# Altium PCB SSL-2020-MainBoard1.PcbDoc
Units mm, origin at the board's own origin, x right, y up, seen from the top; angles counter-clockwise.
Board outline 117.47 x 81.66 mm, 2 copper layers (Top Layer, Bottom Layer); 55 components, 38 nets, 329 pads, 4 vias.
Unrouted connection lines stored in the file: 105.
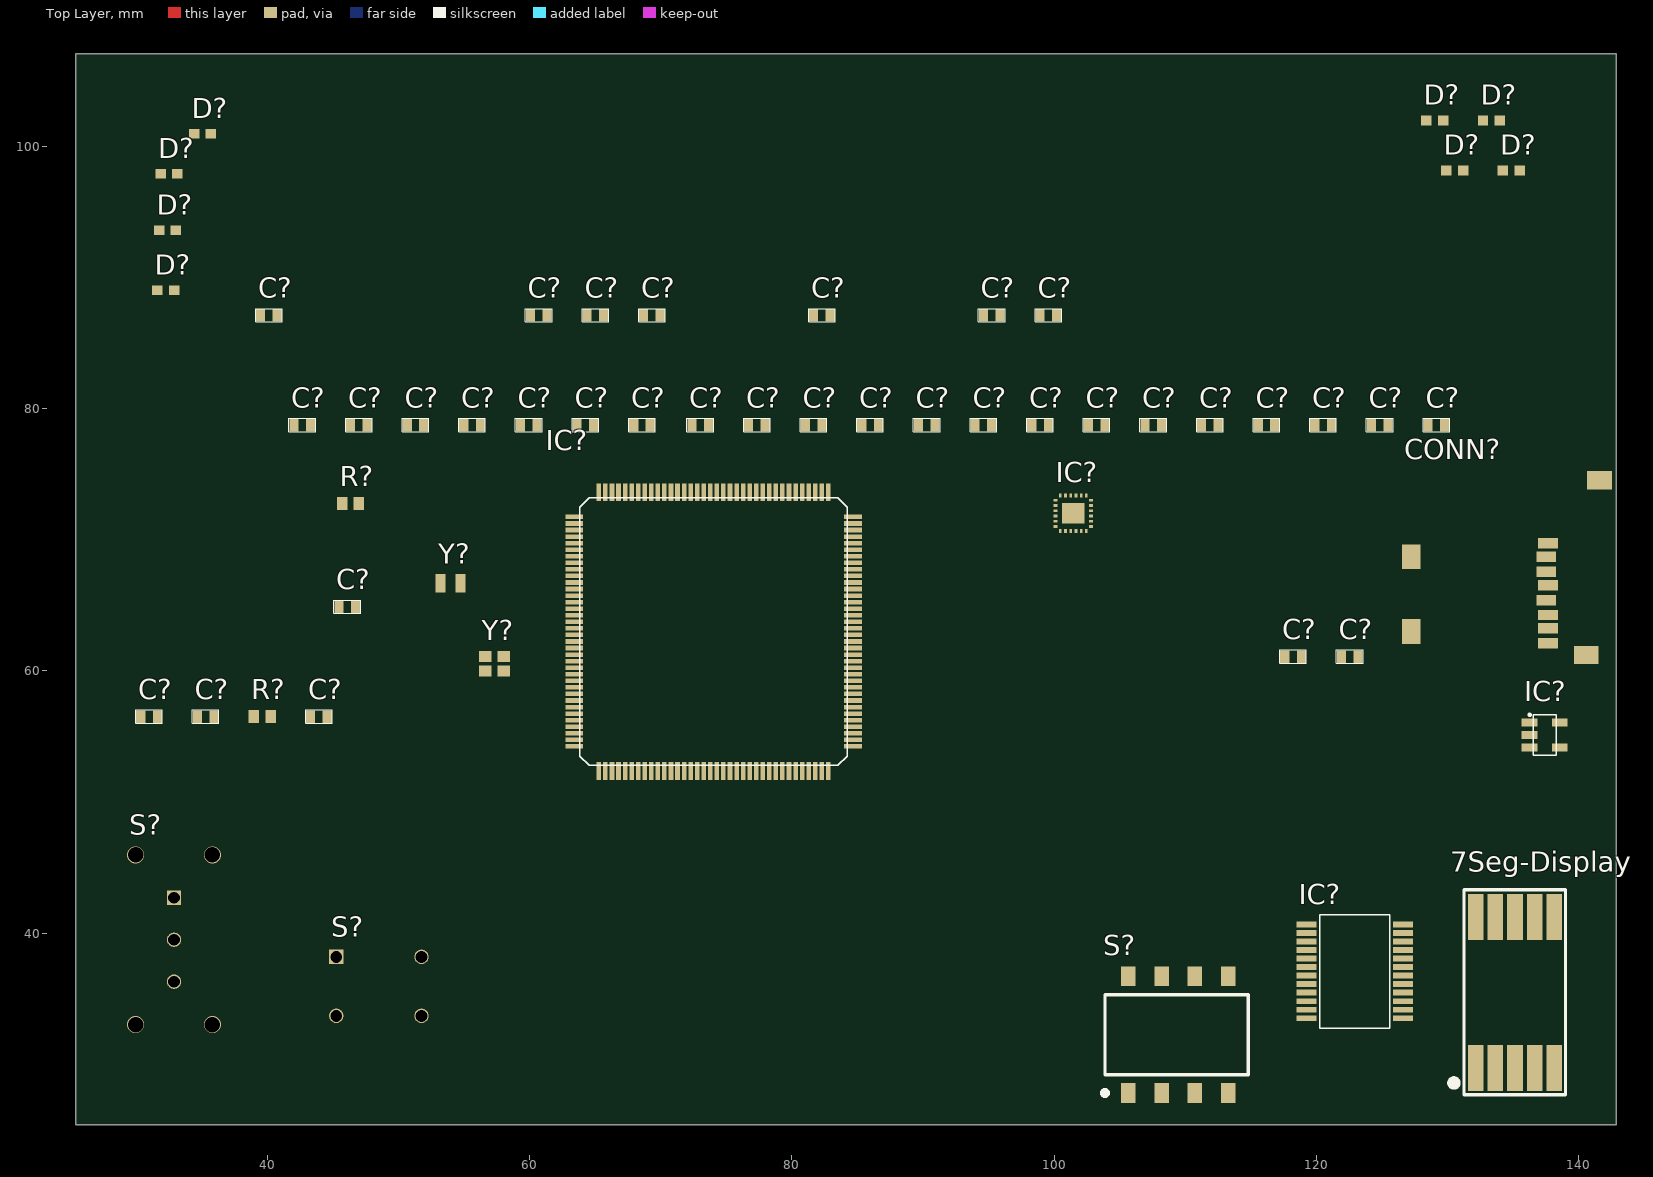
[diagram p0: Top Layer view]
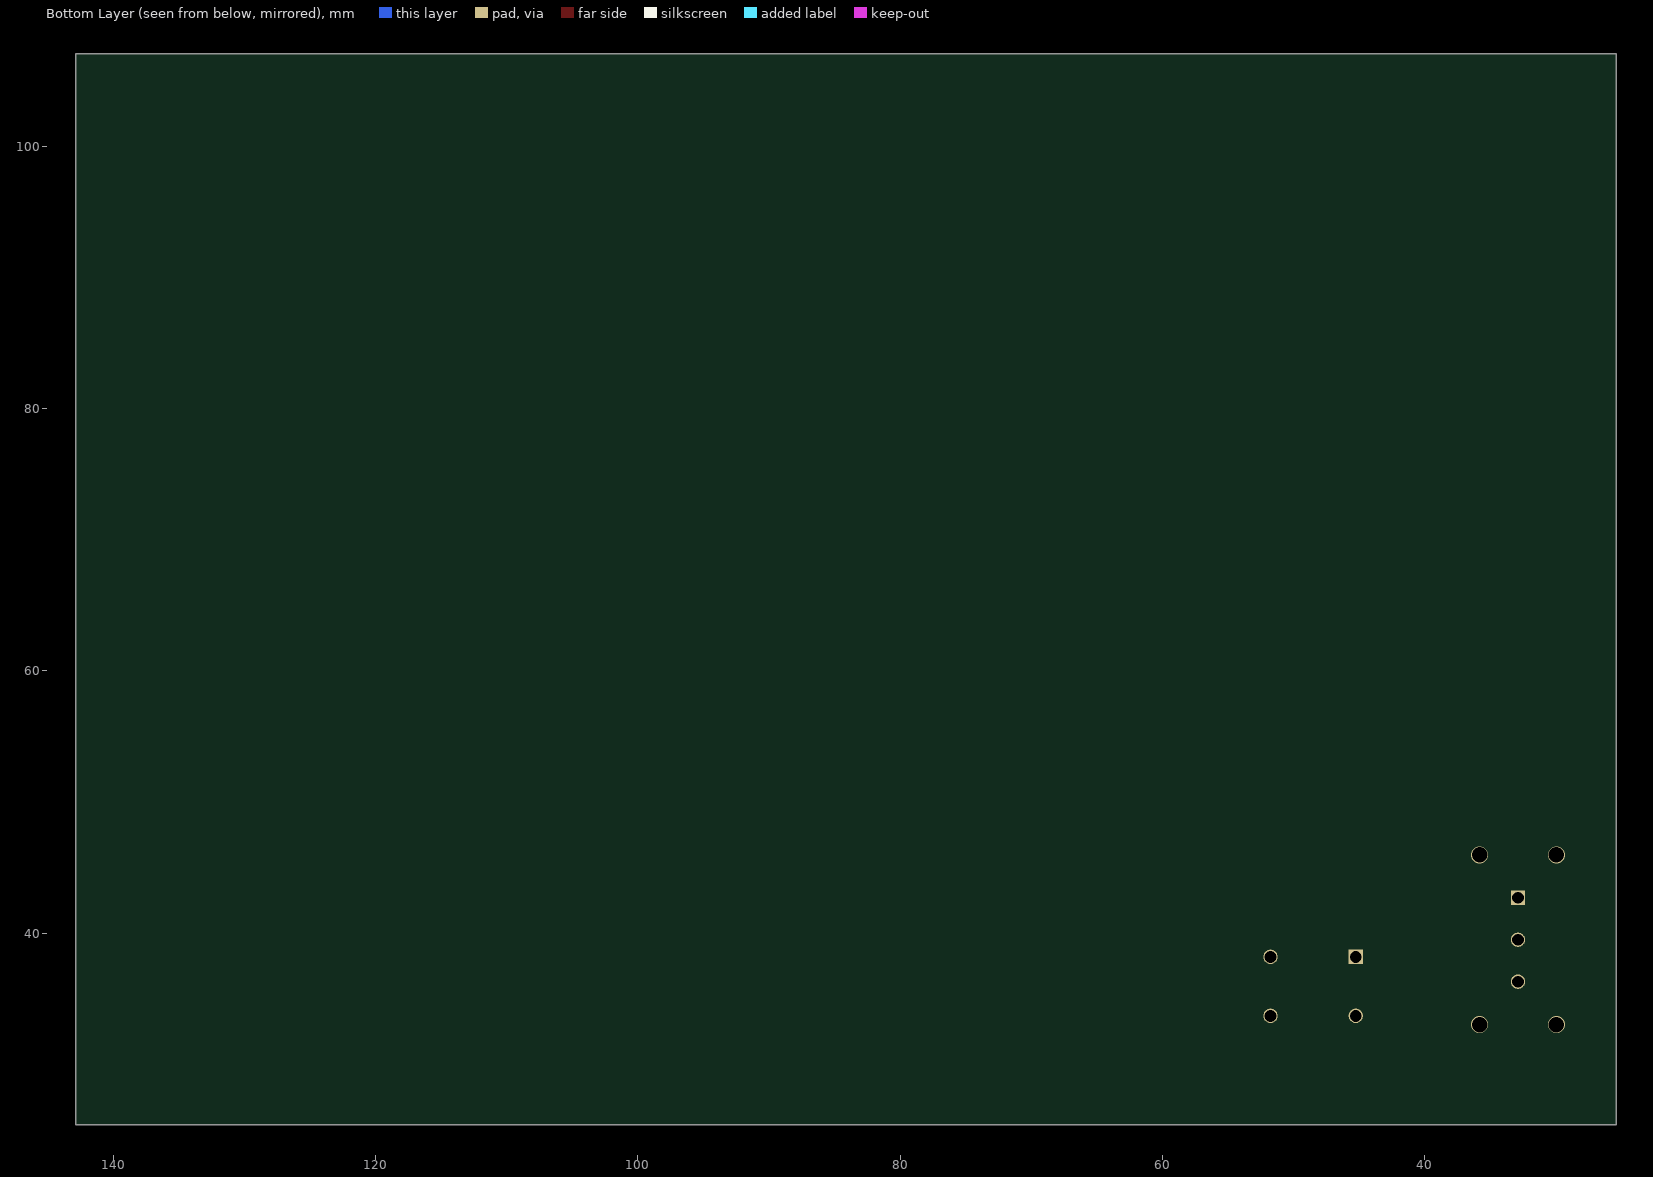
[diagram p1: Bottom Layer view, seen from below]

## Layer stack, top to bottom
Top Solder: solder mask 0.0102, Solder Resist, Dk 3.5
Top Layer: signal copper 0.0356
Dielectric 1: dielectric 0.32, FR-4, Dk 4.8
Bottom Layer: signal copper 0.0356
Bottom Solder: solder mask 0.0102, Solder Resist, Dk 3.5

## Board outline
25.4,25.4 142.875,25.4 142.875,107.061 25.4,107.061

## Design rules (kind name [scope] priority, off if disabled: settings)
Clearance [All] p1: gap=0.254 ignorepadtopadclearanceinfootprint=FALSE except(0: Arc-Hole Track-Hole SMDPad-Hole THPad-Hole Via-Hole Fill-Hole Poly-Hole Region-Hole Text-Hole)
PolygonConnect [All] p1: connectstyle=Relief reliefconductorwidth=0.254 reliefentries=4 polygonreliefangle="90 Angle" airgapwidth=0.254
RoutingVias [All] p1: holewidth=0.711 width=1.27 viastyle="Through Hole" minholewidth=0.711 minwidth=1.27 maxholewidth=0.711 maxwidth=1.27
SolderMaskExpansion [All] p1: expansion=0.102 istentingtop=FALSE
Width [All] p1: maxlimit=0.254 minlimit=0.254 preferedwidth=0.254
30 further rules are at their usual default settings.

## Classes and differential pairs
component class "Logic ICs": 7Seg-Display C? CONN? D? S?
component class Designator: C? R? S? Y?

## Components (designator, comment, footprint, x,y, rotation, side; value= is the part's Value field where it differs from the comment)
7Seg-Display "LDS-SMHTA304RISITR" LDS-SMHTA304RISITR 132.152,29.718 r0 top
C? "100nF" "CAP CER 0603" 60.706,87.122 r0 top
C? "100nF" "CAP CER 0603" 46.101,64.897 r0 top
C? "100nF" "CAP CER 0603" 99.568,87.122 r0 top
C? "100nF" "CAP CER 0603" 40.132,87.122 r0 top
C? "100nF" "CAP CER 0603" 95.25,87.122 r0 top
C? "100nF" "CAP CER 0603" 65.024,87.122 r0 top
C? "100nF" "CAP CER 0603" 69.342,87.122 r0 top
C? "100nF" "CAP CER 0603" 82.296,87.122 r0 top
C? "100nF" "CAP CER 0603" 122.555,61.087 r0 top
C? "100nF" "CAP CER 0603" 90.297,78.74 r0 top
C? "100nF" "CAP CER 0603" 103.251,78.74 r0 top
C? "12pF" "CAP CER 0603" 35.306,56.515 r0 top
C? "100nF" "CAP CER 0603" 77.343,78.74 r0 top
C? "100nF" "CAP CER 0603" 124.841,78.74 r0 top
C? "12pF" "CAP CER 0603" 55.626,78.74 r0 top
C? "10uF" "CAP CER 0603" 98.933,78.74 r0 top
C? "100nF" "CAP CER 0603" 94.615,78.74 r0 top
C? "100nF" "CAP CER 0603" 43.942,56.515 r0 top
C? "100nF" "CAP CER 0603" 51.308,78.74 r0 top
C? "100nF" "CAP CER 0603" 120.523,78.74 r0 top
C? "100nF" "CAP CER 0603" 116.205,78.74 r0 top
C? "100nF" "CAP CER 0603" 59.944,78.74 r0 top
C? "12pF" "CAP CER 0603" 118.237,61.087 r0 top
C? "100nF" "CAP CER 0603" 64.262,78.74 r0 top
C? "100nF" "CAP CER 0603" 68.58,78.74 r0 top
C? "100nF" "CAP CER 0603" 81.661,78.74 r0 top
C? "12pF" "CAP CER 0603" 129.159,78.74 r0 top
C? "1uF" "CAP CER 0603" 73.025,78.74 r0 top
C? "100nF" "CAP CER 0603" 107.569,78.74 r0 top
C? "100nF" "CAP CER 0603" 46.99,78.74 r0 top
C? "100nF" "CAP CER 0603" 42.672,78.74 r0 top
C? "100nF" "CAP CER 0603" 30.988,56.515 r0 top
C? "100nF" "CAP CER 0603" 111.887,78.74 r0 top
C? "1uF" "CAP CER 0603" 85.979,78.74 r0 top
CONN? "CONN uSD CARD" 2908-05WB-MG 135.763,67.437 r270 top
D? "150060SS55040" "LED 0603 RED" 35.052,100.965 r0 top
D? "150060BS55040" "LED 0603 BLUE" 129.032,101.981 r0 top
D? "150060YS55040" "LED 0603 YELLOW" 134.874,98.171 r0 top
D? "150060VS55040" "LED 0603 GREEN" 133.35,101.981 r0 top
D? "150060BS55040" "LED 0603 BLUE" 32.385,93.599 r0 top
D? "150060YS55040" "LED 0603 YELLOW" 32.512,97.917 r0 top
D? "150060SS55040" "LED 0603 RED" 130.556,98.171 r0 top
D? "150060VS55040" "LED 0603 GREEN" 32.258,89.027 r0 top
IC? "TCA9555DBR" SSOP-24 122.936,37.084 r0 top
IC? "24CW160T-I/OT" SOT-23-5 137.414,55.118 r0 top
IC? "ICM-20948" ICM-20948 101.473,72.009 r0 top
IC? "STM32H743ZIT6" LQFP-144 74.041,62.992 r0 top
R? "10K" "RES SMD 0603" 39.624,56.515 r0 top
R? "10K" "RES SMD 0603" 46.355,72.771 r0 top
S? "DS04-254-1-04BK-SMT" DS04-254-1-04BK-SMT 109.474,32.258 r0 top
S? "SKHHAMA010" TACT-SWITCH-6X6X5 48.514,35.941 r0 top
S? "SK12F17G7" SPDT-SWITCH 32.893,39.497 r270 top
Y? "XTAL" XTAL-200X160 57.342,60.537 r0 top
Y? "XTAL" XTAL-200X120 53.975,66.675 r0 top

## Footprints (in the part's own frame and the unit in brackets; to place one, negate y for a bottom-side part, rotate by r counter-clockwise, add the part's x,y. Pads: shape width x height; smd on the part's side, far side on the other; paste and mask are expansions set on the pad)
2908-05WB-MG [mm]
  rect 0.8x1.5 smd: 1(4.191,1.905) 2(5.334,1.905) 3(-2.286,1.905) 4(-1.27,1.778) 5(-0.127,1.778) 6(2.032,1.778) 7(0.889,1.905) 8(3.175,1.905)
  rect 1.4x1.9 smd: ""(-7.112,5.842) ""(6.223,4.826)
  rect 1.9x1.4 smd: ""(-1.27,-8.509) ""(4.445,-8.509)
  body extent -7.38,-8.74 6.62,6.46, height 1.85
"CAP CER 0603" [mm]
  rect 0.7x0.95 smd: 1(-0.635,0) 2(0.635,0)
  silkscreen extent -1.02,-0.51 1.02,0.51, body extent -0.8,-0.4 0.8,0.4, height 0.9
DS04-254-1-04BK-SMT [mm]
  rect 1.1x1.5 smd: 1(-3.81,-4.45) 2(-1.27,-4.45) 3(1.27,-4.45) 4(3.81,-4.45) 5(-3.81,4.45) 6(-1.27,4.45) 7(1.27,4.45) 8(3.81,4.45)
  silkscreen extent -5.71,-4.58 5.33,3.05, body extent -5.71,-4.95 5.45,4.95, height 4.55
ICM-20948 [mm]
  rect 0.3x0.2 smd: 1(-1.35,1) 2(-1.35,0.6) 3(-1.35,0.2) 4(-1.35,-0.2) 5(-1.35,-0.6) 6(-1.35,-1) 13(1.35,-1) 14(1.35,-0.6) 15(1.35,-0.2) 16(1.35,0.2) 17(1.35,0.6) 18(1.35,1)
  rect 0.2x0.3 smd: 7(-1,-1.35) 8(-0.6,-1.35) 9(-0.2,-1.35) 10(0.2,-1.35) 11(0.6,-1.35) 12(1,-1.35) 19(1,1.35) 20(0.6,1.35) 21(0.2,1.35) 22(-0.2,1.35) 23(-0.6,1.35) 24(-1,1.35)
  rect 1.7x1.54 smd: 25(0,0.019)
  body extent -1.51,-1.5 1.51,1.51, height 1
LDS-SMHTA304RISITR [mm]
  rect 1.2x3.5 smd: 1(0,0) 2(1.5,0) 3(3,0) 4(4.5,0) 5(6,0) 6(6,11.5) 7(4.5,11.5) 8(3,11.5) 9(1.5,11.5) 10(0,11.5)
  silkscreen extent -1.9,-2.03 6.86,13.59
"LED 0603 BLUE" [mm]
  rect 0.8x0.75 smd mask+0.05: 1(-0.635,0) 2(0.635,0)
  body extent -0.8,-0.4 0.8,0.4, height 0.6
"LED 0603 GREEN" [mm]
  rect 0.8x0.75 smd mask+0.05: 1(-0.635,0) 2(0.635,0)
  body extent -0.8,-0.4 0.8,0.4, height 0.6
"LED 0603 RED" [mm]
  rect 0.8x0.75 smd mask+0.05: 1(-0.635,0) 2(0.635,0)
  body extent -0.8,-0.4 0.8,0.4, height 0.6
"LED 0603 YELLOW" [mm]
  rect 0.8x0.75 smd mask+0.05: 1(-0.635,0) 2(0.635,0)
  body extent -0.8,-0.4 0.8,0.4, height 0.6
LQFP-144 [mm]
  rect 1.35x0.35 smd: 1(-10.625,8.75) 2(-10.625,8.25) 3(-10.625,7.75) 4(-10.625,7.25) 5(-10.625,6.75) 6(-10.625,6.25) 7(-10.625,5.75) 8(-10.625,5.25) 9(-10.625,4.75) 10(-10.625,4.25) 11(-10.625,3.75) 12(-10.625,3.25) 13(-10.625,2.75) 14(-10.625,2.25) 15(-10.625,1.75) 16(-10.625,1.25) 17(-10.625,0.75) 18(-10.625,0.25) 19(-10.625,-0.25) 20(-10.625,-0.75) 21(-10.625,-1.25) 22(-10.625,-1.75) 23(-10.625,-2.25) 24(-10.625,-2.75) 25(-10.625,-3.25) 26(-10.625,-3.75) 27(-10.625,-4.25) 28(-10.625,-4.75) 29(-10.625,-5.25) 30(-10.625,-5.75) 31(-10.625,-6.25) 32(-10.625,-6.75) 33(-10.625,-7.25) 34(-10.625,-7.75) 35(-10.625,-8.25) 36(-10.625,-8.75) 73(10.625,-8.75) 74(10.625,-8.25) 75(10.625,-7.75) 76(10.625,-7.25) 77(10.625,-6.75) 78(10.625,-6.25) 79(10.625,-5.75) 80(10.625,-5.25) 81(10.625,-4.75) 82(10.625,-4.25) 83(10.625,-3.75) 84(10.625,-3.25) 85(10.625,-2.75) 86(10.625,-2.25) 87(10.625,-1.75) 88(10.625,-1.25) 89(10.625,-0.75) 90(10.625,-0.25) 91(10.625,0.25) 92(10.625,0.75) 93(10.625,1.25) 94(10.625,1.75) 95(10.625,2.25) 96(10.625,2.75) 97(10.625,3.25) 98(10.625,3.75) 99(10.625,4.25) 100(10.625,4.75) 101(10.625,5.25) 102(10.625,5.75) 103(10.625,6.25) 104(10.625,6.75) 105(10.625,7.25) 106(10.625,7.75) 107(10.625,8.25) 108(10.625,8.75)
  rect 0.35x1.35 smd: 37(-8.75,-10.625) 38(-8.25,-10.625) 39(-7.75,-10.625) 40(-7.25,-10.625) 41(-6.75,-10.625) 42(-6.25,-10.625) 43(-5.75,-10.625) 44(-5.25,-10.625) 45(-4.75,-10.625) 46(-4.25,-10.625) 47(-3.75,-10.625) 48(-3.25,-10.625) 49(-2.75,-10.625) 50(-2.25,-10.625) 51(-1.75,-10.625) 52(-1.25,-10.625) 53(-0.75,-10.625) 54(-0.25,-10.625) 55(0.25,-10.625) 56(0.75,-10.625) 57(1.25,-10.625) 58(1.75,-10.625) 59(2.25,-10.625) 60(2.75,-10.625) 61(3.25,-10.625) 62(3.75,-10.625) 63(4.25,-10.625) 64(4.75,-10.625) 65(5.25,-10.625) 66(5.75,-10.625) 67(6.25,-10.625) 68(6.75,-10.625) 69(7.25,-10.625) 70(7.75,-10.625) 71(8.25,-10.625) 72(8.75,-10.625) 109(8.75,10.625) 110(8.25,10.625) 111(7.75,10.625) 112(7.25,10.625) 113(6.75,10.625) 114(6.25,10.625) 115(5.75,10.625) 116(5.25,10.625) 117(4.75,10.625) 118(4.25,10.625) 119(3.75,10.625) 120(3.25,10.625) 121(2.75,10.625) 122(2.25,10.625) 123(1.75,10.625) 124(1.25,10.625) 125(0.75,10.625) 126(0.25,10.625) 127(-0.25,10.625) 128(-0.75,10.625) 129(-1.25,10.625) 130(-1.75,10.625) 131(-2.25,10.625) 132(-2.75,10.625) 133(-3.25,10.625) 134(-3.75,10.625) 135(-4.25,10.625) 136(-4.75,10.625) 137(-5.25,10.625) 138(-5.75,10.625) 139(-6.25,10.625) 140(-6.75,10.625) 141(-7.25,10.625) 142(-7.75,10.625) 143(-8.25,10.625) 144(-8.75,10.625)
  silkscreen extent -10.2,-10.2 10.2,10.2, body extent -11.05,-10.95 10.95,11.05, height 1.58
"RES SMD 0603" [mm]
  rect 0.8x1 smd mask+0.05: 1(-0.635,0) 2(0.635,0)
  body extent -0.8,-0.45 0.8,0.45, height 0.5
SOT-23-5 [mm]
  rect 1.2x0.6 smd mask+0.05: 1(-1.15,0.95) 2(-1.15,0) 3(-1.15,-0.95) 4(1.15,-0.95) 5(1.15,0.95)
  silkscreen extent -1.19,-1.55 0.87,1.57, body extent -1.6,-1.55 1.6,1.45, height 0.92
SPDT-SWITCH [mm]
  rect 1.1x1.1 hole 0.9: 1(-3.2,0)
  round 1.1 hole 0.9: 2(0,0) 3(3.2,0)
  body extent -7,-3.1 7,3.1, height 9.65
SSOP-24 [mm] "SOIC, 24-Leads, Pitch 0.65mm"
  rect 1.5x0.45 smd: 1(-3.683,3.575) 2(-3.683,2.925) 3(-3.683,2.275) 4(-3.683,1.625) 5(-3.683,0.975) 6(-3.683,0.325) 7(-3.683,-0.325) 8(-3.683,-0.975) 9(-3.683,-1.625) 10(-3.683,-2.275) 11(-3.683,-2.925) 12(-3.683,-3.575) 13(3.683,-3.575) 14(3.683,-2.925) 15(3.683,-2.275) 16(3.683,-1.625) 17(3.683,-0.975) 18(3.683,-0.325) 19(3.683,0.325) 20(3.683,0.975) 21(3.683,1.625) 22(3.683,2.275) 23(3.683,2.925) 24(3.683,3.575)
  silkscreen extent -2.67,-4.32 2.67,4.32, body extent -3.95,-4.31 3.95,4.32, height 1.95
TACT-SWITCH-6X6X5 [mm]
  rect 1.1x1.1 hole 0.9: 1(-3.25,2.25)
  round 1.1 hole 0.9: 2(3.25,2.25) 3(-3.25,-2.25) 4(3.25,-2.25)
  body extent -3.87,-3.01 3.87,3.02, height 5.01
XTAL-200X120 [mm]
  rect 0.75x1.4 smd mask+0.05: 1(-0.762,0) 2(0.762,0)
  body extent -1,-0.6 1,0.6, height 0.6
XTAL-200X160 [mm]
  rect 0.95x0.85 smd mask+0.05: 1(-0.7,-0.55) 2(0.7,-0.55) 3(0.7,0.55) 4(-0.7,0.55)
  body extent -1.05,-0.85 1.05,0.85, height 0.56

## Part data
7Seg-Display: "Display Modules - LED Character and Numeric Red 7-Segment 1 Character Common Anode 1.95V 20mA 0.394\" H x 0.287\" W x 0.154\" D (10.00mm x 7.30mm x 3.90mm) 10-SMD, No Lead", ComponentLink1Description=Datasheet, ComponentLink1URL=https://www.lumex.com/spec/LDS-SMHTA304RISITR.pdf
C? C? C? C? C? C? C? C? C? C? C? C? C? C? C? C? C? C? C? C? C? C? C? C? C? C? C?: library part "CAP CER 0603 25V 100nF", "Multilayer Ceramic Capacitors MLCC - SMD/SMT 25V 0.1uF 0603 Y5V -20/+80%", Mfr=KEMET, Mfr Nr=C0603C104Z3VACTU, Voltage Rating=25V, Dimensions="0603 (1608 metric)", Series="SMD Comm Y5V", Type="Ceramic Capacitor"
C? C? C? C?: library part "CAP CER 0603 50V 12pF", "Multilayer Ceramic Capacitors MLCC - SMD/SMT 50V 12pF 0603 C0G 5%", Mfr=KEMET, Mfr Nr=C0603C120J5GAC, Voltage Rating=50V, Dimensions="0603 (1608 metric)", Series="SMD Comm C0G", Type="Ceramic Capacitor"
C?: library part "CAP CER 0603 6.3V 10uF", "Multilayer Ceramic Capacitors MLCC - SMD/SMT 0603 6.3V 10uF X5R 10% Soft Term", Mfr=TDK, Mfr Nr=C1608X5R0J106K080AE, Voltage Rating=6.3V, Dimensions="0603 (1608 metric)", Series=C, Type="Ceramic Capacitor"
C? C?: library part "CAP CER 0603 25V 1uF", "Multilayer Ceramic Capacitors MLCC - SMD/SMT 1uF 25V X5R 10%", Mfr=KEMET, Mfr Nr=C0603C105K3PAC7411, Voltage Rating=25V, Dimensions="0603 (1608 metric)", Series="SMD Comm X5R", Type="Ceramic Capacitor"
CONN?: library part 2908-05WB-MG, "8 Position Card Connector Secure Digital - microSD™ Surface Mount, Right Angle Gold"
D? D?: "Standard LEDs - SMD WL-SMCD SMD MonoChip 0603 Super Red 645nm", Color=Red, Forward Current=20mA, Forward Voltage=2V, Mfr="Wurth Elektronik", Package="0603 (1608 metric)", Series=WL-SMCD
D? D?: "Standard LEDs - SMD WL-SMCD SMD Mono SMD 0603 Blue 465nm", Color=Blue, Forward Current=20mA, Forward Voltage=2V, Mfr="Wurth Elektronik", Package="0603 (1608 metric)", Series=WL-SMCD
D? D?: "Standard LEDs - SMD WL-SMCD SMD MonoChip 0603 Yllw 591nm", Color=Yellow, Forward Current=20mA, Forward Voltage=2V, Mfr="Wurth Elektronik", Package="0603 (1608 metric)", Series=WL-SMCD
D? D?: "Standard LEDs - SMD WL-SMCD SMD MonoChip 0603 BrtGrn 575nm", Color=Green, Forward Current=20mA, Forward Voltage=2V, Mfr="Wurth Elektronik", Package="0603 (1608 metric)", Series=WL-SMCD
IC?: "Interface - I/O Expanders 1.65 to 5.5V, 16bit I/O Expander", Mfr="Texas Instruments", Package=SSOP-24, Supply Voltage=5.5V, Mfr Nr=TCA9555DBR, Nr of I/Os="16 I/O", Series=TCA9555
IC?: "EEPROM Memory IC 16Kb (2K x 8) I²C 1MHz 450ns SOT-23-5"
IC?: "IMU ACCEL/GYRO/COMPI2C/SPI 24QFN"
IC?: "ARM Microcontrollers - MCU High-performance and DSP with DP-FPU, ARM Cortex-M7 MCU with 2MBytes Flash, 1MB RAM, 400 MHz CPU, Art Accelerator, L1 cache, external memory interface, large set of peripherals", Mfr=STMicroelectronics, Package=LQFP-144, Core="ARM Cortex M7", Mfr Nr=STM32H743ZIT6, Series=STM32H743ZI
R? R?: library part "RES SMD 0603 10K", "Thick Film Resistors - SMD 1/10Watt 10Kohms 1% Commercial Use", Mfr="Vishay / Dale", Mfr Nr=CRCW060310K0FKEAC, Power Rating="1/10 W", Dimensions="0603 (1608 metric)"
S?: "Dip Switch SPST 4 Position Surface Mount Slide (Standard) Actuator 25mA 24VDC", ComponentLink1Description=Datasheet, ComponentLink1URL=https://br.mouser.com/datasheet/2/670/ds04-254-smt-1777718.pdf
S?: "Tactile Switches 6.0x6.0x5.0mm 160gf", Current Rating="50 mA", Mfr=ALPS, Voltage Rating="12 VDC", Contact Form=SPST, Mfr Nr=SKHHAMA010, Series=SKHH, Type="Tactile Switch"
S?: "Slide Switches SPDT 0.3 Amp at 30 V", Current Rating="300 mA", Mfr=C&K, Voltage Rating="30 VDC", Contact Form=SPDT, Mfr Nr=SK12F17G7, Series=SK, Type="Slide Switch"
Y?: library part FA-12825F10Z-AC, "Crystals 25MHz 10PPM -20C +75C 9.0pF", Frequency="25 MHz", Load Capacitance="9 pF", Mfr="Epson Timing", Mfr Nr="FA-128  25.0000MF10Z-AC", Package="2 mm x 1.6 mm", Tolerance="10 PPM", ESR="80 Ohms", Series=FA-128
Y?: library part ABS06-32.768KHZ-9-T, "Crystals 32.768KHz 9pF 20ppm -40 C+85C", Frequency="32.768 kHz", Load Capacitance="9 pF", Mfr=ABRACON, Package="2 mm x 1.6 mm", Tolerance="20 PPM", ESR="90 kOhms", Mfr Nr=ABS06-32.768KHZ-9-T, Series=ABS06

## Via types
v1: diameter 1.3, hole 1.2, Top Layer to Bottom Layer, 4 vias

## Nets (pads, with @x,y where several pads share a name; then routed paths per layer and width w, separated by ;. In a path a pad name is that pad's centre, name@x,y a point inside that pad or via, vN(x,y) a via of type N, cw(c..) or ccw(c..) an arc to the next point about the centre after c; other vN are vias at no path point)
1V8: C?.1@98.933,87.122 IC?.8@100.873,70.659
3V3: C?.1@45.466,64.897 CONN?.4 IC?.5@138.564,56.068 IC?.13@102.823,71.009 IC?.24@126.619,40.659 S?.5 S?.6 S?.7 S?.8
BOOT0: R?.2@46.99,72.771
Display_A: IC?.20@126.619,38.059
Display_B: IC?.19@126.619,37.409
Display_C: IC?.18@126.619,36.759
Display_D: IC?.17@126.619,36.109
Display_DP: IC?.13@126.619,33.509
Display_E: IC?.16@126.619,35.459
Display_F: IC?.15@126.619,34.809
Display_G: IC?.14@126.619,34.159
GND: C?.1@34.671,56.515 C?.1@117.602,61.087 C?.1@121.92,61.087 C?.2@31.623,56.515 C?.2@43.307,78.74 C?.2@44.577,56.515 C?.2@46.736,64.897 C?.2@47.625,78.74 C?.2@51.943,78.74 C?.2@56.261,78.74 C?.2@60.579,78.74 C?.2@64.897,78.74 C?.2@69.215,78.74 C?.2@73.66,78.74 C?.2@77.978,78.74 C?.2@82.296,78.74 C?.2@86.614,78.74 C?.2@90.932,78.74 C?.2@95.25,78.74 C?.2@95.885,87.122 C?.2@99.568,78.74 C?.2@100.203,87.122 C?.2@103.886,78.74 C?.2@108.204,78.74 C?.2@112.522,78.74 C?.2@116.84,78.74 C?.2@121.158,78.74 C?.2@125.476,78.74 C?.2@129.794,78.74 CONN?.6 D?.2 IC?.2@136.264,55.118 IC?.3@119.253,39.359 IC?.11@102.073,70.659 IC?.12@119.253,33.509 IC?.16@63.416,64.242 IC?.18@102.823,73.009 IC?.20@102.073,73.359 IC?.21@126.619,38.709 IC?.25@101.473,72.028 IC?.31 S?.1@45.264,38.191 S?.2@51.764,38.191 S?.3@32.893,36.297 Y?.2@58.042,59.987 Y?.4
INT_IMU: IC?.12@102.473,70.659
INT_PEXP: IC?.1@119.253,40.659
nCS_IMU: IC?.22@101.273,73.359
nCS_SD: CONN?.2
NetC?_1: C?.1@94.615,87.122 IC?.10@101.673,70.659
NetIC?_8: IC?.8@119.253,36.109 S?.4@113.284,27.808
NetIC?_9: IC?.9@119.253,35.459 S?.3@110.744,27.808
NetIC?_10: IC?.10@119.253,34.809 S?.2@108.204,27.808
NetIC?_11: IC?.11@119.253,34.159 S?.1@105.664,27.808
NetR?_1: R?.1@45.72,72.771 S?.2@32.893,39.497
NRST: C?.2@123.19,61.087 IC?.25@63.416,59.742 R?.2@40.259,56.515 S?.3@45.264,33.691 S?.4@51.764,33.691
OSC25M_IN: C?.2@35.941,56.515 IC?.23@63.416,60.742 Y?.1@56.642,59.987
OSC25M_OUT: C?.1@128.524,78.74 IC?.24@63.416,60.242 Y?.3
OSC32_IN: C?.2@118.872,61.087 IC?.8@63.416,68.242
OSC32_OUT: C?.1@54.991,78.74 IC?.9@63.416,67.742
SCL1: IC?.1@136.264,56.068 IC?.22@126.619,39.359
SCLK1: IC?.23@100.873,73.359
SCLK2: CONN?.5
SDA1: IC?.3@136.264,54.168 IC?.23@126.619,40.009
SDI1: IC?.24@100.473,73.359
SDI2: CONN?.3
SDO1: IC?.9@101.273,70.659
SDO2: CONN?.7
VCC: IC?.2@119.253,40.009
VDD: C?.1@30.353,56.515 C?.1@42.037,78.74 C?.1@43.307,56.515 C?.1@46.355,78.74 C?.1@50.673,78.74 C?.1@59.309,78.74 C?.1@63.627,78.74 C?.1@67.945,78.74 C?.1@76.708,78.74 C?.1@81.026,78.74 C?.1@85.344,78.74 C?.1@89.662,78.74 C?.1@93.98,78.74 C?.1@98.298,78.74 C?.1@102.616,78.74 C?.1@106.934,78.74 C?.1@115.57,78.74 C?.1@119.888,78.74 C?.1@124.206,78.74 IC?.6@63.416,69.242 IC?.17@63.416,63.742 IC?.30 R?.1@38.989,56.515 S?.1@32.893,42.697
VDDA: C?.1@72.39,78.74 C?.1@111.252,78.74 IC?.32 IC?.33
pads on no net: 7Seg-Display.1 7Seg-Display.2 7Seg-Display.3 7Seg-Display.4 7Seg-Display.5 7Seg-Display.6 7Seg-Display.7 7Seg-Display.8 7Seg-Display.9 7Seg-Display.10 C?.1@39.497,87.122 C?.1@60.071,87.122 C?.1@64.389,87.122 C?.1@68.707,87.122 C?.1@81.661,87.122 C?.2@40.767,87.122 C?.2@61.341,87.122 C?.2@65.659,87.122 C?.2@69.977,87.122 C?.2@82.931,87.122 CONN?. CONN?.1 CONN?.8 D?.1 IC?.1@63.416,71.742 IC?.1@100.123,73.009 IC?.2@63.416,71.242 IC?.2@100.123,72.609 IC?.3@63.416,70.742 IC?.3@100.123,72.209 IC?.4 IC?.5@63.416,69.742 IC?.5@100.123,71.409 IC?.5@119.253,38.059 IC?.6@100.123,71.009 IC?.6@119.253,37.409 IC?.7 IC?.10@63.416,67.242 IC?.11@63.416,66.742 IC?.12@63.416,66.242 IC?.13@63.416,65.742 IC?.14@63.416,65.242 IC?.14@102.823,71.409 IC?.15@63.416,64.742 IC?.15@102.823,71.809 IC?.16@102.823,72.209 IC?.17@102.823,72.609 IC?.18@63.416,63.242 IC?.19@63.416,62.742 IC?.19@102.473,73.359 IC?.20@63.416,62.242 IC?.21@63.416,61.742 IC?.21@101.673,73.359 IC?.22@63.416,61.242 IC?.26 IC?.27 IC?.28 IC?.29 IC?.34 IC?.35 IC?.36 IC?.37 IC?.38 IC?.39 IC?.40 IC?.41 IC?.42 IC?.43 IC?.44 IC?.45 IC?.46 IC?.47 IC?.48 IC?.49 IC?.50 IC?.51 IC?.52 IC?.53 IC?.54 IC?.55 IC?.56 IC?.57 IC?.58 IC?.59 IC?.60 IC?.61 IC?.62 IC?.63 IC?.64 IC?.65 IC?.66 IC?.67 IC?.68 IC?.69 IC?.70 IC?.71 IC?.72 IC?.73 IC?.74 IC?.75 IC?.76 IC?.77 IC?.78 IC?.79 IC?.80 IC?.81 IC?.82 IC?.83 IC?.84 IC?.85 IC?.86 IC?.87 IC?.88 IC?.89 IC?.90 IC?.91 IC?.92 IC?.93 IC?.94 IC?.95 IC?.96 IC?.97 IC?.98 IC?.99 IC?.100 IC?.101 IC?.102 IC?.103 IC?.104 IC?.105 IC?.106 IC?.107 IC?.108 IC?.109 IC?.110 IC?.111 IC?.112 IC?.113 IC?.114 IC?.115 IC?.116 IC?.117 IC?.118 IC?.119 IC?.120 IC?.121 IC?.122 IC?.123 IC?.124 IC?.125 IC?.126 IC?.127 IC?.128 IC?.129 IC?.130 IC?.131 IC?.132 IC?.133 IC?.134 IC?.135 IC?.136 IC?.137 IC?.138 IC?.139 IC?.140 IC?.141 IC?.142 IC?.143 IC?.144 Y?.1@53.213,66.675 Y?.2@54.737,66.675
copper on no net:
  other v1: 29.972,33.02 35.814,33.02 29.972,45.974 35.814,45.974